# EAGLE board riffle-0.97 (EAGLE 7.3.0)
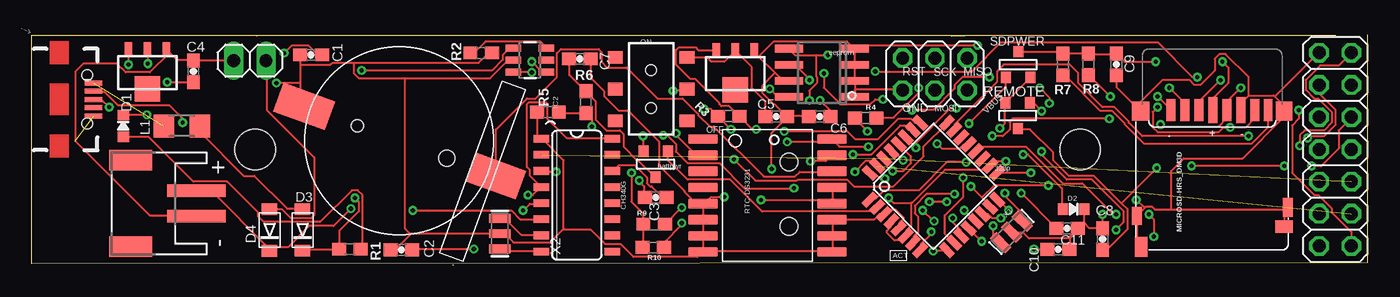
[diagram p0: board, top side]
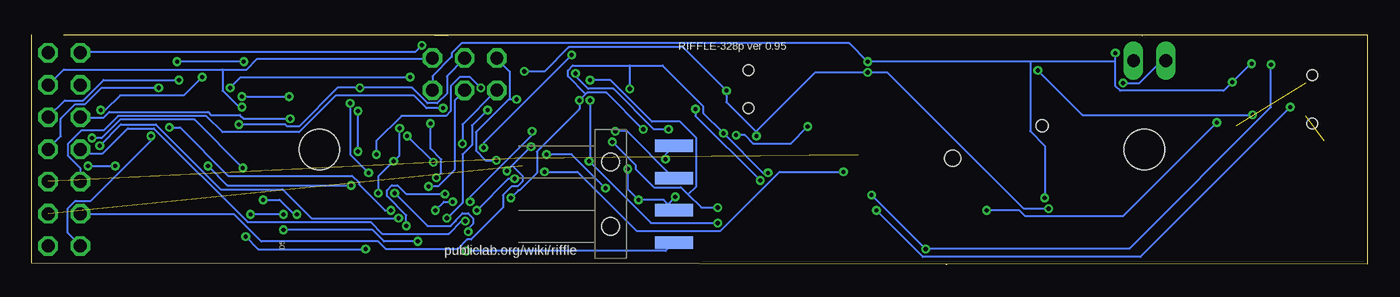
[diagram p1: board, bottom side, seen from below]

Size 105.25 x 18.15 mm. Coordinates in mm from the lower left corner, seen from the top.
Outline: 105.25,18.15 105.25,0.15 0,0.1 0,18.13 17.73,18.1
Outline: 17.73,18.1 102.72,18.11
Outline: 17.75,18.06 17.73,18.1
Outline: 23.37,18.11 23.42,18.11
Outline: 33.15,0 33.25,0
Outline: 72.47,18.06 74.59,18.1
Copper layers (1*16): Top 0.0356mm / dielectric 1.5011mm / Bottom 0.0356mm
Design rules "LaenPCBOrder": minimum track width 6mil, minimum drill 13mil, track to track 6mil, track to pad 6mil, pad to pad 6mil, via to via 6mil, smd to smd 6mil, copper to edge 15mil, drill to drill 6mil, minimum pad ring 7mil, minimum via ring 7mil, stop-mask expansion 3mil, vias tented up to drill 0mil, thermal gap 10mil
Holes 3.2 mm at 82.59,9.1 17.59,9.1

## Footprints (pad centres in the part's own frame; a part is rotated, then mirrored left to right if it is on the bottom)
BATTCON_12MM_SMT = smd 2.4 x 4.3: P$1 0,11.96 | smd 2.4 x 4.2: P$2 0,-4.1 | hole 0.95: 0,7.5 | hole 1.25: 0,0
SOT-23 = smd 0.787 x 0.889: 1 0.025,-1.016; 2 -0.94,1.016; 3 0.991,1.016
0603-CAP = smd 1.1 x 1: 1 -0.85,0; 2 0.85,0
JST-PH-2-SMT-RA = smd 1 x 4.6: 1 1,-3.7; 2 -1,-3.7 | smd 1.6 x 3.4: NC1 -3.4,1.5; NC2 3.4,1.5
0603-LED = smd 0.8 x 0.9: MINUS -0.85,0; PLUS 0.85,0
SOD-123FL = smd 0.91 x 1.22: A 1.637,0; C -1.637,0
TQFP32-08 = smd 1.27 x 0.559: 1 -4.293,2.8; 2 -4.293,2; 3 -4.293,1.2; 4 -4.293,0.4; 5 -4.293,-0.4; 6 -4.293,-1.2; 7 -4.293,-2; 8 -4.293,-2.8; 17 4.293,-2.8; 18 4.293,-2; 19 4.293,-1.2; 20 4.293,-0.4; 21 4.293,0.4; 22 4.293,1.2; 23 4.293,2; 24 4.293,2.8 | smd 0.559 x 1.27: 9 -2.8,-4.293; 10 -2,-4.293; 11 -1.2,-4.293; 12 -0.4,-4.293; 13 0.4,-4.293; 14 1.2,-4.293; 15 2,-4.293; 16 2.8,-4.293; 25 2.8,4.293; 26 2,4.293; 27 1.2,4.293; 28 0.4,4.293; 29 -0.4,4.293; 30 -1.2,4.293; 31 -2,4.293; 32 -2.8,4.293
SOT23-5 = smd 0.55 x 1.2: 1 -0.95,-1.3; 2 0,-1.3; 3 0.95,-1.3; 4 0.95,1.3; 5 -0.95,1.3; 6 0,1.3
SO16 = smd 0.6 x 1.2: 1 -4.445,-2.8; 2 -3.175,-2.8; 3 -1.905,-2.8; 4 -0.635,-2.8; 5 0.635,-2.8; 6 1.905,-2.8; 7 3.175,-2.8; 8 4.445,-2.8; 9 4.445,2.8; 10 3.175,2.8; 11 1.905,2.8; 12 0.635,2.8; 13 -0.635,2.8; 14 -1.905,2.8; 15 -3.175,2.8; 16 -4.445,2.8
SOT89 = smd 0.58 x 1.2: 1 -1.5,-1.8; 2 0,-1.8; 3 1.5,-1.8 | smd 2 x 2: 4 0,1.3
SO-08 = smd 0.6 x 2.2: 1 -1.905,-2.6; 2 -0.635,-2.6; 3 0.635,-2.6; 4 1.905,-2.6; 5 1.905,2.6; 6 0.635,2.6; 7 -0.635,2.6; 8 -1.905,2.6
2X03 = drill 1.016 octagon: 1 -2.54,-1.27; 2 -2.54,1.27; 3 0,-1.27; 4 0,1.27; 5 2.54,-1.27; 6 2.54,1.27
AYZ0202 = smd 1 x 1.15: 1 -2.5,2.825; 2 0,2.825; 3 2.5,2.825; 4 -2.5,-2.825; 5 0,-2.825; 6 2.5,-2.825 | hole 0.85: 1.5,0; -1.5,0
1X02 = drill 1.016 long: 1 -1.27,0; 2 1.27,0
1X04-SMD = smd 1 x 3: 1 -3.81,5; 2 -1.27,5; 3 1.27,5; 4 3.81,5 | hole 1.4: -2.54,0; 2.54,0
2X07 = drill 1.016 octagon: 1 -7.62,-1.27; 2 -7.62,1.27; 3 -5.08,-1.27; 4 -5.08,1.27; 5 -2.54,-1.27; 6 -2.54,1.27; 7 0,-1.27; 8 0,1.27; 9 2.54,-1.27; 10 2.54,1.27; 11 5.08,-1.27; 12 5.08,1.27; 13 7.62,-1.27; 14 7.62,1.27
R1206 = smd 1.6 x 1.803: 1 -1.422,0; 2 1.422,0
0603-NO = smd 1.1 x 1: 1 -0.85,0; 2 0.85,0
DS3231 = smd 0.762 x 2.286: 1 -4.445,-5.08; 2 -3.175,-5.08; 3 -1.905,-5.08; 4 -0.635,-5.08; 5 0.635,-5.08; 6 1.905,-5.08; 7 3.175,-5.08; 8 4.445,-5.08; 9 4.445,5.08; 10 3.175,5.08; 11 1.905,5.08; 12 0.635,5.08; 13 -0.635,5.08; 14 -1.905,5.08; 15 -3.175,5.08; 16 -4.445,5.08
DM3D = smd 0.7 x 1.75: CD/DAT3 8.15,0.45; CLK 4.85,0.45; CMD 7.05,0.45; DAT0 2.65,0.45; DAT1 1.6,0.45; DAT2 9.25,0.45 | smd 0.8 x 1.5: GND1 0.05,8.15 | smd 0.8 x 1.4: GND2 11.95,8.8 | smd 1.4 x 1.5: GND3 11.65,0.55 | smd 1.3 x 1.5: GND4 0.35,0.55 | smd 1 x 1.55: SW_A 11.6,11.25 | smd 1.4 x 1: SW_B 0.35,9.65 | smd 0.7 x 2.032: VDD 5.95,0.45; VSS 3.75,0.45
USB-AB-MICRO-SMD_V02_BOSS = smd 1.4 x 0.4: D+1 2.7,0; D-1 2.7,0.65; GND1 2.7,-1.3; ID1 2.7,-0.65; VBUS1 2.7,1.3 | hole 0.85: 2.2,1.9; 2.2,-1.9
RESONATOR-SMD = smd 0.7 x 1.7: 1 -1.2,0; 2 0,0; 3 1.2,0

## Placement (x,y rotation side)
BAT  CR1220  [BATTCON_12MM_SMT]  32.7,8.41 70 top
BATTPOWER  FDN340P  [SOT-23]  49.12,7.94 0 top
C1  10uF  [0603-CAP]  22.01,16.56 0 top
C2  0.1uF  [0603-CAP]  29.12,1.19 180 top
C3  0.1uF  [0603-CAP]  49.15,5.32 0 top
C4  10uF  [0603-CAP]  12.75,15.27 90 top
C5  10uF  [0603-CAP]  58.63,11.7 0 top
C6  10uF  [0603-CAP]  62.09,11.7 180 top
C7  0.1uF  [0603-CAP]  43.19,16.26 180 top
C8  0.1uF  [0603-CAP]  84.36,2.02 90 top
C9  0.1uF  [0603-CAP]  85.45,15.8 90 top
C10  0.1uF  [0603-CAP]  80.88,1.23 0 top
C11  0.1uF  [0603-CAP]  81.56,2.88 180 top
CN1  [JST-PH-2-SMT-RA]  9.29,4.85 90 top
D1  LED0603  [0603-LED]  7.22,10.96 270 top
D2  LED0603  [0603-LED]  82.07,4.4 180 top
D3  SCHOTTKY  [SOD-123FL]  21.34,2.75 90 top
D4  SCHOTTKY  [SOD-123FL]  18.74,2.75 90 top
IC1  ATMEGA328P  [TQFP32-08]  71.04,6.2 45 top
IC2  MCP73831  [SOT23-5]  39.24,16.15 270 top
IC3  CH340G  [SO16]  42.94,5.5 270 top
IC4  MCP1700-33  [SOT89]  55.43,15.1 180 top
IC5  24AA128SN  [SO-08]  62.26,15.15 90 top
IC6  MCP1700-33  [SOT89]  9.12,15.17 180 top
ISP  [2X03]  71.15,15.05 180 top
J1  AYZ0202  [AYZ0202]  48.8,13.87 270 top
JP1  [1X02]  17.18,16.11 0 top
JP3  [1X04-SMD]  59.64,5.58 270 bottom
JP5  [2X07]  102.69,9.11 270 top
L1  500mA  [R1206]  11.83,10.97 0 top
R1  10K  [0603-NO]  25.05,1.25 180 top
R2  4.7K  [0603-NO]  35.4,16.71 180 top
R3  10K  [0603-NO]  54.9,11.73 0 top
R4  10K  [0603-NO]  65.69,11.59 180 top
R5  10K  [0603-NO]  40.67,12.06 0 top
R6  10K  [0603-NO]  43.66,12.85 90 top
R7  50K  [0603-NO]  81.23,15.8 270 top
R8  50K  [0603-NO]  83.24,15.83 90 top
R9  10K  [0603-NO]  49.03,3.21 180 top
R10  10K  [0603-NO]  48.95,1.38 180 top
REMOTE  FDN340P  [SOT-23]  77.64,11.78 0 top
RTC-DS3231  DS3231  [DS3231]  57.96,5.48 270 top
SDPWER  FDN340P  [SOT-23]  77.73,15.8 180 top
U$1  MICROSD-HRS_DM3D  [DM3D]  99,12.67 180 top
U$4  [USB-AB-MICRO-SMD_V02_BOSS]  2.17,13.06 0 top
X2  12MHz  [RESONATOR-SMD]  36.88,2.47 270 top
X3  16 MHz  [RESONATOR-SMD]  77.18,2.6 45 top

## Library data of the parts
BAT IC2 IC3 J1 X2 = SparkFunNew
BATTPOWER REMOTE SDPWER = zetex; OC_FARNELL: unknown; OC_NEWARK: unknown
C1-C11 JP3 X3 = SparkFun
CN1 D3 D4 IC4 IC6 L1 = adafruit
D1 D2 = LowPowerLab
IC1 = atmel; MPN: ATMEGA8-16AU; OC_FARNELL: 9171371; OC_NEWARK: 73M8863
IC5 = microchip; MF: MICROCHIP; MPN: 24AA128-I/SN; OC_FARNELL: unknown; OC_NEWARK: 92C6842
ISP JP1 JP5 = pinhead
R1-R10 = microbuilder
RTC-DS3231 = _lh-library
U$1 = hrs_DM3D-SF
U$4 = Testing

## Nets
A0: IC1.23 JP5.13
A1: IC1.24 JP3.1
A2: IC1.25 JP3.2
A3: IC1.26 R5.2 R6.1
AREF: C10.1 IC1.20
D2: IC1.32 JP5.7
D3: IC1.1 JP5.5
D4: BATTPOWER.3 IC1.2
D5: IC1.9 JP3.4
D6: IC1.10 SDPWER.3
D7: IC1.11 U$1.CD/DAT3
D8: IC1.12 REMOTE.3
D9: IC1.13 R4.2
D10: IC1.14 JP5.2
D+: IC3.5 U$4.D+1
D-: IC3.6 U$4.D-1
GND: BAT.P$1 C1.1 C2.2 C4.2 C5.2 C6.2 C7.1 C8.2 C9.1 C10.2 C11.1 CN1.2 D2.MINUS IC1.3 IC1.5 IC1.21 IC2.2 IC3.1 IC4.1 IC5.1 IC5.2 IC5.3 IC5.4 IC5.7 IC6.1 ISP.6 JP1.1 JP3.3 JP5.1 R2.1 R5.1 RTC-DS3231.5 RTC-DS3231.6 RTC-DS3231.7 RTC-DS3231.8 RTC-DS3231.9 RTC-DS3231.10 RTC-DS3231.11 RTC-DS3231.12 RTC-DS3231.13 U$1.GND1 U$1.GND2 U$1.GND3 U$1.GND4 U$1.SW_A U$1.SW_B U$1.VSS U$4.GND1 X2.2 X3.2
MISO: IC1.16 ISP.1 JP5.4 U$1.DAT0
MOSI: IC1.15 ISP.4 JP5.6 U$1.CMD
N$1: D1.PLUS R1.1
N$2: IC1.7 X3.1
N$3: IC1.8 X3.3
N$4: C9.2 R7.1 R8.2 SDPWER.1 U$1.VDD
N$5: D1.MINUS IC2.1
N$6: IC2.5 R2.2
N$7: C8.1 JP5.3 REMOTE.1
N$8: C2.1 IC3.4 IC3.16 IC6.3
N$10: D3.A L1.2
N$11: IC3.7 X2.1
N$13: IC3.8 X2.3
N$14: D4.A JP1.2
N$15: BATTPOWER.1 C7.2 R6.2
N$16: R7.2 U$1.DAT1
N$17: D2.PLUS R4.1
N$18: R8.1 U$1.DAT2
N$19: L1.1 U$4.VBUS1
RESET: C3.1 IC1.29 ISP.5 R3.1
RST: C3.2 IC3.14
RTC_BATT: BAT.P$2 RTC-DS3231.14
RXD: IC1.30 IC3.2 JP5.10
SCK: IC1.17 ISP.3 JP5.8 U$1.CLK
SCL: IC1.28 IC5.6 JP5.11 R9.1 RTC-DS3231.16
SDA: IC1.27 IC5.5 JP5.9 R10.1 RTC-DS3231.15
TXD: IC1.31 IC3.3 JP5.12
VBAT [vcc]: BATTPOWER.2 CN1.1 D4.C IC2.3 J1.2 JP5.14
VBUS [vcc]: C1.2 C4.1 D3.C IC2.4 IC6.2 ISP.2 R1.2
VCC: C6.1 C11.2 IC1.4 IC1.6 IC1.18 IC4.3 IC5.8 R3.2 R9.2 R10.2 REMOTE.2 RTC-DS3231.2 SDPWER.2
VDD: C5.1 IC4.2 J1.1

## Tracks (layer width: path | path; a pad name or v marks a point on that pad's centre or on a via)
A0  (via drill 0.33)
  Top 0.152: v95.86,10.16 87.48,10.16 86.41,11.23 86.41,11.3 85.27,12.45 84.35,12.45 82.45,14.35 82.45,15.11 81.76,15.8 76.58,15.8 76.05,15.27 76.05,14.43 72.69,11.07 72.69,10.69 IC1.23
  Bottom 0.152: v95.86,10.16 95.86,9.78 100.58,5.05 101.8,5.05 102.41,4.44 102.41,2.54 101.42,1.55 JP5.13
A1  (via drill 0.33)
  Top 0.152: v55.32,8.33 57,6.65 60.27,6.65 60.35,6.73 64.24,6.73 64.77,6.2 67.89,6.2 70.26,8.56 70.26,9.32 72.08,11.15 IC1.24
  Bottom 0.152: v55.32,8.33 55.32,8.71 54.71,9.32 JP3.1
A2  (via drill 0.33)
  Top 0.152: v59.28,10.54 64.24,10.54 64.85,9.93 66.67,9.93 68.27,11.53 69.27,11.53 69.57,11.23 69.95,11.23 IC1.25
  Bottom 0.152: v59.28,10.54 58.37,10.54 54.71,6.88 JP3.2
A3  (via drill 0.33)
  Top 0.152: R5.2 41.53,11.99 43.59,11.99 R6.1 43.59,11.91 44.12,11.38 v44.12,10.92 | v64.69,8.71 66.14,8.71 68.43,11 68.73,11 69.04,10.69 69.42,10.69 IC1.26 | v60.05,6.05 56.16,6.05 54.18,8.03 51.66,8.03 50.75,8.94 50.75,9.55 50.06,10.24 v49.76,10.24
  Bottom 0.152: v64.69,8.71 62.71,8.71 v60.05,6.05 | v49.76,10.24 49.07,10.24 48.39,9.55 45.49,9.55 v44.12,10.92
AREF  (via drill 0.33)
  Top 0.152: v78.94,1.24 80.01,1.24 C10.1 | v88.39,2.24 88.39,3.61 v88.01,3.99 | v85.42,3.99 85.19,3.99 82.75,6.43 81.23,6.43 78.33,9.32 74.68,9.32 74.37,9.02 IC1.20
  Bottom 0.152: v78.94,1.24 87.4,1.24 v88.39,2.24 | v85.42,3.99 v88.01,3.99
D2  (via drill 0.33)
  Top 0.152: v67.21,6.81 66.83,6.81 66.45,7.19 66.07,7.19 IC1.32 | v70.18,4.29 71.02,3.45 v71.09,3.45
  Bottom 0.152: v67.21,6.81 67.67,6.81 v70.18,4.29 | v71.09,3.45 71.4,3.45 72.39,2.46 77.65,2.46 78.56,3.38 88.24,3.38 95.63,10.77 97.69,10.77 99.67,8.79 101.04,8.79 101.35,9.09 JP5.7
D3  (via drill 0.33)
  Top 0.152: v73.61,8.1 72.08,8.1 69.88,5.89 67.13,5.89 66.45,5.21 66.07,5.21 IC1.1 | v75.67,10.16 76.5,10.16 77.04,10.69 77.04,11.3 77.27,11.53 v84.89,11.53
  Bottom 0.152: v75.67,10.16 v73.61,8.1 | v84.89,11.53 88.54,11.53 88.85,11.84 91.13,11.84 91.36,12.06 99.14,12.06 99.59,11.61 101.35,11.61 JP5.5
D4
  Top 0.152: BATTPOWER.3 50.14,8.94 50.14,8.25 51.66,6.73 55.02,6.73 57.53,4.22 66.22,4.22 66.52,4.52 IC1.2
D5  (via drill 0.33)
  Top 0.152: v71.02,1.09 71.09,1.17 72.08,1.17 IC1.9
  Bottom 0.152: v71.02,1.09 55.32,1.09 54.71,1.7 JP3.4
D6  (via drill 0.33)
  Top 0.152: v73.84,11.15 76.73,14.05 76.73,14.73 SDPWER.3 | v73.38,6.88 73.38,5.36 71.93,3.91 71.93,2.46 72.62,1.78 IC1.10
  Bottom 0.152: v73.84,11.15 73.84,9.17 73,8.33 73,7.26 v73.38,6.88
D7  (via drill 0.33)
  Top 0.152: v72.54,3.68 72.54,3.38 73.15,2.77 73.15,2.39 IC1.11 | v69.34,12.22 71.02,12.22 72.69,13.89 72.69,14.2 73.3,14.81 v75.44,14.81 | v89.61,13.97 90.83,12.75 90.83,12.29 U$1.CD/DAT3
  Bottom 0.152: v72.54,3.68 71.32,4.9 71.32,8.71 70.56,9.47 70.56,11 v69.34,12.22 | v75.44,14.81 88.77,14.81 v89.61,13.97
D8  (via drill 0.33)
  Top 0.152: v79.55,12.14 78.94,12.75 78.64,12.75 REMOTE.3 | v79.55,8.94 79.55,8.71 81.53,6.73 83.51,6.73 86.03,4.22 86.03,3.38 v85.42,2.77 | v74.83,1.85 73.84,2.84 IC1.12
  Bottom 0.152: v79.55,8.94 v79.55,12.14 | v85.42,2.77 78.41,2.77 77.5,1.85 v74.83,1.85
D9  (via drill 0.33)
  Top 0.152: v65.84,10.54 64.85,11.53 R4.2 | v72.08,4.98 v70.71,4.98 | v73.46,4.29 74.29,3.45 IC1.13
  Bottom 0.152: v65.84,10.54 65.84,10.24 70.71,5.36 v70.71,4.98 | v72.08,4.98 72.77,4.98 v73.46,4.29
D10  (via drill 0.33)
  Top 0.152: v76.35,3.68 75.67,3.68 75.36,3.99 74.98,3.99 IC1.14 | v99.9,9.4 99.9,10.24 100.28,10.62 101.8,10.62 102.41,11.23 102.41,12.06 101.35,13.13 101.04,13.13 100.36,13.82 100.36,14.58 101.5,15.72 102.95,15.72 103.94,16.71 JP5.2
  Bottom 0.152: v76.35,3.68 83.21,3.68 85.5,5.97 90.37,5.97 95.48,11.07 98.22,11.07 v99.9,9.4
D+  (via drill 0.33)
  Top 0.152: v38.71,4.29 39.24,4.83 40.08,4.83 IC3.5 | v6.1,12.45 5.49,13.06 U$4.D+1
  Bottom 0.152: v38.71,4.29 35.05,0.63 17.91,0.63 v6.1,12.45
D-  (via drill 0.33)
  Top 0.152: v30.02,4.29 37.79,4.29 38.48,3.61 40.08,3.61 IC3.6 | v11.89,11.23 11.89,11.53 10.82,12.6 6.78,12.6 5.71,13.67 4.88,13.67 U$4.D-1
  Bottom 0.152: v30.02,4.29 27.43,4.29 26.97,3.84 19.28,3.84 v11.89,11.23
GND  (via drill 0.33)  (1 unrouted)
  Top 0.152: JP1.1 15.85,16.1 12.8,16.1 C4.2 12.73,16.18 11.43,16.18 10.67,16.94 IC6.1 10.82,16.71 9.3,15.19 7.39,15.19 6.71,15.87 4.04,15.87 3.43,15.27 3.43,9.78 9.3,3.91 12.95,3.91 CN1.2 | 21.18,14.35 21.18,12.75 21.41,12.52 BAT.P$1 | 21.18,14.35 21.18,15.8 | 21.18,15.8 21.18,16.56 C1.1 | 25.37,15.95 23.7,15.95 23.55,15.8 21.18,15.8 | 25.37,15.95 35.2,15.95 35.89,16.64 36.19,16.64 R2.1 | 29.41,14.73 25.76,14.73 25.37,15.11 25.37,15.95 | 29.41,14.73 36.12,14.73 37.49,16.1 37.87,16.1 IC2.2 | 21.18,14.35 v19.28,14.35 | C9.1 85.5,14.88 85.5,13.97 87.32,12.14 U$1.GND3 87.02,12.52 89.08,14.58 91.21,14.58 91.59,14.2 92.05,14.2 93.19,15.34 93.19,16.26 93.57,16.64 94.03,16.64 95.86,14.81 95.86,13.36 | 97.92,13.28 97.84,13.36 95.86,13.36 | 97.92,13.28 98.6,12.6 98.6,12.14 U$1.GND4 98.6,12.06 98.6,11.61 95.4,8.41 90.75,8.41 89.76,7.42 89.76,4.37 | 95.86,13.36 95.25,12.75 95.25,12.29 U$1.VSS | 97.92,13.28 101.35,16.71 JP5.1 | D2.MINUS 82.91,4.37 82.91,3.38 82.45,2.92 C11.1 | 81.76,2.08 81.76,2.24 82.37,2.84 C11.1 | 81.76,2.08 81.76,1.24 C10.2 | C11.1 82.91,3.3 83.29,2.92 84.35,2.92 C8.2 84.35,3 v84.35,3.99 | 81.76,2.08 78.56,2.08 78.1,2.54 77.19,2.54 X3.2 | U$1.SW_B 98.68,3.07 98.68,4.29 98.91,4.52 U$1.GND1 98.68,4.37 89.76,4.37 | U$1.SW_A 87.32,1.47 87.1,1.7 87.1,3.84 U$1.GND2 87.1,3.91 87.67,4.48 | 89.76,4.37 88.47,4.37 88.24,4.6 87.78,4.6 87.67,4.48 | 87.67,4.48 v87.02,5.13 | C5.2 59.51,11.76 61.19,11.76 C6.2 | 58.56,15.15 59.13,14.58 59.59,14.58 IC5.7 | 58.56,15.15 57.26,16.45 | 57.26,16.45 57,16.71 57,16.87 IC4.1 | 58.56,15.15 57.53,14.12 57.53,13.59 58.45,12.67 58.52,12.67 59.44,11.76 C5.2
  Top 0.152: 64.85,17.09 IC5.4 | 64.85,13.82 64.85,14.5 IC5.2 64.85,14.58 64.85,15.72 IC5.3 64.85,15.8 64.85,17.02 IC5.4 | 64.85,13.82 64.85,13.28 IC5.1 | 73.84,9.55 IC1.21 73.76,9.47 73.38,9.47 73.08,9.17 71.7,9.17 v71.32,9.55 | 64.85,13.82 68.58,13.82 ISP.6 | 57.26,16.45 58.45,17.63 64.24,17.63 64.77,17.09 IC5.4 | R5.1 39.85,11.99 39.85,10.24 40.08,10.01 IC3.1 | 40.16,9.93 IC3.1 | 29.83,2.43 29.87,2.46 X2.2 36.96,2.46 37.26,2.46 37.95,1.78 40.84,1.78 41.87,2.81 | 29.83,2.43 28.65,1.24 28.35,1.24 C2.2 | 41.87,2.81 41.91,2.84 41.91,8.25 40.23,9.93 IC3.1 | 63.09,5.13 63.09,6.05 RTC-DS3231.13 | 63.09,5.13 63.09,4.9 RTC-DS3231.12 63.09,5.13 | v57.45,5.13 63.09,5.13 | IC1.5 68.35,2.92 68.35,3.3 68.66,3.61 68.66,3.76 68.05,4.37 67.51,4.37 67.21,4.06 IC1.3 67.13,3.99 66.75,3.99 66.37,3.61 63.09,3.61 RTC-DS3231.11 63.09,3.53 63.09,2.31 RTC-DS3231.10 63.09,2.24 63.09,1.09 RTC-DS3231.9 63.02,1.09 52.96,1.09 RTC-DS3231.8 | RTC-DS3231.8 52.88,1.09 52.88,2.24 RTC-DS3231.7 52.88,3.53 RTC-DS3231.6 52.88,3.61 52.88,4.83 RTC-DS3231.5 | C7.1 44.04,14.73 45.11,13.67 45.11,13.28 46.25,12.14 47.02,12.14 49.45,9.7 49.45,7.8 51.43,5.82 51.43,5.74 52.27,4.9 52.81,4.9 RTC-DS3231.5 | v54.56,5.36 53.49,5.36 52.96,4.83 RTC-DS3231.5 | 41.87,2.81 41.91,2.77 44.04,2.77 45.19,1.63 46.41,1.63 47.4,0.63 52.43,0.63 52.81,1.02 RTC-DS3231.8 | v58.29,7.57 58.29,10.39 59.44,11.53 59.44,11.68 C5.2 | v74.52,17.32 65.15,17.32 64.92,17.09 IC5.4 | 29.41,14.73 29.41,2.84 29.83,2.43
  Bottom 0.152: v19.28,14.35 17.98,14.35 16.23,16.1 15.93,16.1 JP1.1 | v84.35,3.99 84.58,3.99 85.72,5.13 v87.02,5.13 | v71.32,9.55 71.32,11.07 68.66,13.74 ISP.6 | 55.13,4.79 54.71,4.37 JP3.3 | 55.13,4.79 55.47,5.13 v57.45,5.13 58.29,5.97 v58.29,7.57 | v54.56,5.36 55.13,4.79 | v74.52,17.32 75.06,16.79 101.35,16.79 JP5.1
MISO  (via drill 0.33)
  Top 0.152: v76.96,4.29 76.12,5.13 IC1.16 | U$1.DAT0 96.32,12.22 96.32,11.53 95.63,10.85 v94.41,10.85 93.88,10.85 93.5,10.46 88.7,10.46 88.32,10.85 88.32,12.06 v88.7,12.45
  Bottom 0.152: v76.96,4.29 77.42,4.29 79.48,6.35 79.48,6.5 80.01,7.04 89.76,7.04 93.57,10.85 v94.41,10.85 | 90.22,15.42 102.72,15.42 103.94,14.2 JP5.4 | 90.22,15.42 88.32,15.42 87.48,16.26 73.76,16.26 ISP.1 | v88.7,12.45 88.93,12.45 90.22,13.74 90.22,15.42
MOSI  (via drill 0.33)
  Top 0.152: v73.99,6.2 74.87,5.32 | 74.87,5.32 75.44,4.75 75.44,4.6 IC1.15 | v93.65,14.58 91.97,12.9 91.97,12.29 U$1.CMD | 74.87,5.32 75.82,6.27 v80.09,6.27 | v98.68,7.8 v91.36,7.8 | v100.81,7.8 101.57,7.8 102.95,9.17 102.95,10.62 103.94,11.61 JP5.6
  Bottom 0.152: v73.99,6.2 73.23,6.2 71.93,7.49 71.93,12.98 71.17,13.74 ISP.4 | v93.65,14.58 99.59,14.58 101.19,12.98 102.64,12.98 103.94,11.68 JP5.6 | v80.09,6.27 89.84,6.27 v91.36,7.8 | v100.81,7.8 v98.68,7.8
N$1
  Top 0.152: D1.PLUS 7.24,10.08 9.22,10.08 12.73,6.58 15.39,6.58 17.83,4.14 17.83,3.84 18.29,3.38 22.71,3.38 25.22,5.89 25.68,5.89 26.06,5.51 26.06,1.47 25.91,1.32 R1.1
N$2  (via drill 0.33)
  Top 0.152: v72.69,5.59 70.48,5.59 69.57,4.67 69.57,4.06 69.8,3.84 69.8,2.54 69.49,2.24 69.49,1.78 IC1.7 | v75.74,3.07 75.74,2.31 76.28,1.78 X3.1
  Bottom 0.152: v72.69,5.59 75.74,5.59 76.43,6.27 76.89,6.27 77.27,5.89 77.27,5.44 75.74,3.91 v75.74,3.07
N$3  (via drill 0.33)
  Top 0.152: v70.87,2.62 70.87,2.46 70.03,1.63 70.03,1.24 IC1.8 | v76.66,5.66 76.66,5.44 78.03,4.06 X3.3
  Bottom 0.152: v70.87,2.62 70.87,2.84 70.48,3.23 70.48,3.68 70.87,4.06 71.32,4.06 71.86,3.53 71.86,3.45 72.24,3.07 74.07,3.07 v76.66,5.66
N$4  (via drill 0.33)
  Top 0.152: SDPWER.1 77.72,16.79 81.08,16.79 81.15,16.71 R7.1 81.23,16.71 83.21,16.71 R8.2 83.29,16.64 85.42,16.64 C9.2 85.5,16.64 86.11,16.03 v88.54,16.03 | v93.8,16.03 94.26,15.57 94.26,14.35 93.12,13.21 93.12,12.29 U$1.VDD
  Bottom 0.152: v88.54,16.03 v93.8,16.03
N$5  (via drill 0.33)
  Top 0.152: v9.07,11.84 7.24,11.84 D1.MINUS | v25.98,15.34 36.27,15.34 37.11,16.18 37.11,16.56 37.64,17.09 37.87,17.09 IC2.1
  Bottom 0.152: v9.07,11.84 22.48,11.84 v25.98,15.34
N$6
  Top 0.152: R2.2 34.59,16.71 34.82,16.71 35.74,17.63 40.08,17.63 40.54,17.17 IC2.5
N$7  (via drill 0.33)
  Top 0.152: 85.84,4.86 86.33,4.37 86.33,2.84 84.73,1.24 84.43,1.24 C8.1 | 85.84,4.86 83.67,7.04 81.69,7.04 80.47,8.25 80.47,8.86 78.64,10.69 77.72,10.69 REMOTE.1 | v100.51,10.01 100.66,10.16 101.8,10.16 102.72,11.07 102.72,12.22 101.42,13.51 101.42,14.12 JP5.3 | 85.84,4.86 v88.62,7.65
  Bottom 0.152: v100.51,10.01 99.75,10.01 98.3,11.46 92.43,11.46 v88.62,7.65
N$8  (via drill 0.33)
  Top 0.152: v34.82,1.24 30.02,1.24 C2.1 | v39.09,5.51 39.47,5.51 40.08,6.12 IC3.4 40.08,6.2 39.24,7.04 39.24,7.49 39.01,7.72 39.01,12.67 39.17,12.83 40.46,12.83 40.61,12.67 40.61,11.53 42.14,10.01 45.72,10.01 IC3.16 | v7.62,15.8 7.62,16.94 IC6.3
  Bottom 0.152: v39.09,5.51 v34.82,1.24 34.82,1.32 18.74,1.32 7.62,12.45 v7.62,15.8
N$10
  Top 0.152: D3.A 21.34,4.44 20.12,4.44 17.53,7.04 16.69,7.04 13.26,10.46 13.26,10.92 L1.2
N$11
  Top 0.152: IC3.7 40.08,2.39 38.56,2.39 37.34,3.61 36.96,3.61 X2.1
N$13
  Top 0.152: IC3.8 40.08,1.09 37.11,1.09 36.96,1.24 X2.3
N$14
  Top 0.152: D4.A 18.74,4.37 19.74,4.37 20.42,3.68 22.02,3.68 22.25,3.91 22.25,8.48 18.52,12.22 18.52,16.1 JP1.2
N$15
  Top 0.152: BATTPOWER.1 49.07,6.96 47.78,8.25 47.7,8.25 46.63,9.32 46.63,10.31 46.33,10.62 45.26,10.62 44.42,11.46 44.42,12.9 43.66,13.67 R6.2 43.59,13.74 42.37,14.96 42.37,16.26 C7.2
N$16
  Top 0.152: R7.2 81.23,14.88 81.46,14.88 84.2,12.14 85.12,12.14 86.11,11.15 86.11,11.07 87.63,9.55 96.09,9.55 97.38,10.85 97.38,12.22 U$1.DAT1
N$17  (via drill 0.33)
  Top 0.152: v78.1,8.71 78.49,8.71 81.15,6.05 81.15,4.44 D2.PLUS | v69.88,13.97 69.88,13.59 67.89,11.61 66.6,11.61 R4.1
  Bottom 0.152: v78.1,8.71 78.1,9.78 76.12,11.76 72.62,11.76 72.24,12.14 72.24,14.12 71.55,14.81 70.71,14.81 v69.88,13.97
N$18  (via drill 0.33)
  Top 0.152: v84.96,13.28 83.29,14.96 R8.1 | v88.7,13.28 89.69,12.29 U$1.DAT2
  Bottom 0.152: v88.7,13.28 v84.96,13.28
N$19  (1 unrouted)
RESET  (via drill 0.33)
  Top 0.152: v68.66,8.25 67.97,8.94 67.74,8.94 IC1.29 | v47.85,6.65 47.85,6.58 48.23,6.2 48.23,5.36 C3.1 | v52.96,12.29 53.49,12.29 54.03,11.76 R3.1 54.1,11.68 v55.09,10.69 | v67.06,13.06 66.45,13.06 66.07,12.67 63.7,12.67 62.41,13.97 v62.41,15.11
  Bottom 0.152: v68.66,8.25 69.49,8.25 70.26,9.02 70.26,10.46 67.63,13.09 | 67.63,13.09 67.59,13.13 67.59,15.27 68.58,16.26 ISP.5 | v47.85,6.65 52.96,11.76 v52.96,12.29 | v67.06,13.06 67.59,13.06 67.63,13.09 | v62.41,15.11 62.41,14.88 61.42,13.89 59.44,13.89 56.24,10.69 v55.09,10.69
RST
  Top 0.152: C3.2 49.99,5.36 49.68,5.36 48.84,6.2 48.69,6.2 48.46,6.43 48.46,6.88 47.47,7.87 46.25,7.87 45.8,7.42 IC3.14
RTC_BATT
  Top 0.152: RTC-DS3231.14 63.02,7.34 60.5,7.34 60.12,6.96 57.68,6.96 53.72,10.92 53.42,10.92 52.5,11.84 52.5,11.91 51.28,13.13 49.3,13.13 46.86,15.57 45.34,15.57 44.88,16.03 44.88,16.79 44.65,17.02 41.68,17.02 41.38,16.71 41.38,14.81 39.7,13.13 39.01,13.13 36.58,10.69 36.58,7.04 BAT.P$2
RXD  (2 unrouted)
SCK  (via drill 0.33)
  Top 0.152: v95.25,13.97 94.18,12.9 94.18,12.29 U$1.CLK 94.11,12.22 94.11,11.53 93.5,10.92 89.08,10.92 v88.93,11.07 | v78.71,7.26 76.12,7.26 IC1.17 | v80.16,12.75 80.16,13.21 v79.4,13.97
  Bottom 0.152: v95.25,13.97 99.75,13.97 101.04,12.67 101.8,12.67 102.95,11.53 102.95,10.16 103.94,9.17 JP5.8 | v78.71,7.26 80.16,8.71 v80.16,12.75 | ISP.3 71.17,16.26 72.54,14.88 72.54,13.51 73.3,12.75 74.07,12.75 75.29,13.97 v79.4,13.97 81.15,13.97 84.2,10.92 85.12,10.92 85.27,11.07 v88.93,11.07
SCL  (via drill 0.33)
  Top 0.152: v51.21,4.52 49.91,3.23 R9.1 | v59.51,9.7 62.86,9.7 63.02,9.86 RTC-DS3231.16 63.09,9.86 63.63,9.32 v65.91,9.32 | v67.82,7.42 68.66,7.42 69.27,8.03 69.27,8.56 68.35,9.47 IC1.28 | v61.26,14.58 61.26,14.66 60.2,15.72 59.66,15.72 IC5.6
  Bottom 0.152: v51.21,4.52 52.5,4.52 53.53,5.55 | 53.53,5.55 54.1,6.12 56.24,6.12 57.68,7.57 57.68,7.87 v59.51,9.7 | v65.91,9.32 67.4,7.84 | 67.4,7.84 v67.82,7.42 | v61.26,14.58 59.66,14.58 56.39,11.3 54.18,11.3 52.88,10.01 52.88,6.2 53.53,5.55 | 67.4,7.84 66.6,7.04 66.6,6.58 66.98,6.2 67.44,6.2 68.12,5.51 68.12,4.52 70.64,2.01 70.94,2.01 71.7,1.24 77.34,1.24 77.95,1.85 87.17,1.85 89.31,3.99 101.35,3.99 JP5.11
SDA  (via drill 0.33)
  Top 0.152: v51.21,3.3 51.21,3.15 49.83,1.78 49.83,1.4 R10.1 | v61.34,8.18 62.56,8.18 63.02,8.64 RTC-DS3231.15 | 61.8,16.56 60.12,16.56 59.66,17.02 IC5.5 | 61.8,16.56 v62.71,16.56 | IC1.27 68.88,10.01 v69.65,9.25 69.49,9.47 72.39,12.37 v72.85,12.37 | v61.26,12.98 61.26,13.74 61.87,14.35 61.87,14.81 61.8,14.88 61.8,16.56
  Bottom 0.152: v51.21,3.3 56.46,3.3 v61.34,8.18 61.26,8.18 v61.26,12.98 | v69.65,9.25 69.65,9.63 v62.71,16.56 | v72.85,12.37 74.14,12.37 75.13,13.36 81.31,13.36 84.2,10.46 90.22,10.46 91.52,11.76 98.45,11.76 99.59,10.62 101.35,10.62 102.41,9.55 102.41,8.64 101.42,7.65 JP5.9
TXD  (via drill 0.33)  (1 unrouted)
  Top 0.152: v41.3,7.34 40.16,7.34 IC3.3 | v64.85,7.34 65.68,8.18 66.22,8.18 66.52,7.87 IC1.31
  Bottom 0.152: v41.3,7.34 46.33,7.34 50.98,2.69 57.61,2.69 62.26,7.34 v64.85,7.34
VBAT  (via drill 0.33)
  Top 0.152: CN1.1 13.03,5.82 14.17,5.82 18.67,1.32 18.67,1.17 D4.C 18.67,1.4 20.19,1.4 21.87,3.07 23.77,3.07 v25.15,4.44 | v48.16,10.16 48.16,9.02 BATTPOWER.2 | v50.52,13.74 51.51,13.74 51.59,13.82 J1.2 | v39.4,15.19 IC2.3 | v99.82,12.22 99.82,11.53 99.29,11 99.29,7.26 101.04,5.51 101.35,5.51 102.41,4.44 102.41,4.14 103.94,2.62 103.94,1.55 JP5.14 | v91.82,14.81 91.44,14.81 88.7,17.55 76.35,17.55 74.07,15.27 v66.45,15.27
  Bottom 0.152: v48.16,10.16 48.16,10.46 48.2,10.5 | 48.2,10.5 50.52,12.83 v50.52,13.74 53.95,17.17 62.94,17.17 64.85,15.27 v66.45,15.27 | 48.2,10.5 43.51,15.19 v39.4,15.19 37.87,15.19 27.13,4.44 v25.15,4.44 | v99.82,12.22 99.44,12.22 98.3,13.36 93.27,13.36 v91.82,14.81
VBUS  (via drill 0.33)
  Top 0.152: D3.C 21.41,1.17 21.49,1.24 24.16,1.24 R1.2 24.23,1.32 24.23,2.69 25.76,4.22 25.76,4.98 v25.45,5.28 | v10.67,14.43 12.73,14.43 C4.1 | v9.14,15.87 9.14,16.94 IC6.2 | v19.89,16.71 20.5,17.32 21.79,17.32 22.48,16.64 22.78,16.64 C1.2 | v39.4,16.03 40.16,15.27 40.54,15.27 IC2.4
  Bottom 0.152: v9.14,15.87 9.22,15.87 v10.67,14.43 11.35,13.74 19.51,13.74 19.89,14.12 19.89,16.03 | 19.89,16.03 v19.89,16.71 | 19.89,16.03 26.59,16.03 | 26.59,16.03 v39.4,16.03 40.84,17.48 71.4,17.48 72.16,16.71 72.16,16.41 73.69,14.88 73.69,13.82 ISP.2 | v25.45,5.28 25.45,9.4 26.59,10.54 26.59,16.03
VCC  (via drill 0.33)
  Top 0.152: SDPWER.2 78.64,14.73 76.73,12.83 REMOTE.2 76.66,12.75 76.66,11.15 v76.28,10.77 | IC1.4 67.67,3.38 67.67,3 67.36,2.69 67.36,2.54 67.97,1.93 68.43,1.93 68.81,2.31 IC1.6 68.88,2.39 68.88,2.69 69.27,3.07 69.27,4.83 69.3,4.86 | v77.95,5.66 80.7,2.92 C11.2 | v76.73,8.18 75.82,8.18 75.51,7.87 IC1.18 75.44,7.8 75.13,7.49 71.93,7.49 69.3,4.86 | 59.66,13.28 IC5.8 59.59,13.28 58.75,13.28 v58.14,13.89 | R10.2 48.16,1.4 48.16,3.15 R9.2 48.16,3.23 48.16,4.06 47.24,4.98 v47.24,7.26 | v62.1,12.98 62.86,12.22 62.86,11.76 C6.1 | v57.07,10.69 56.77,10.69 55.78,11.68 R3.2 55.7,11.76 54.94,12.52 54.33,12.52 54.18,12.67 54.18,12.75 52.27,14.66 51.89,14.66 50.75,15.8 50.75,16.94 50.98,17.17 52.27,17.17 52.5,16.94 53.87,16.94 IC4.3 | v50.75,10.39 50.75,10.24 52.27,8.71 52.81,8.71 RTC-DS3231.2 | v67.51,5.28 67.89,4.9 69.27,4.9 69.3,4.86
  Bottom 0.152: v77.95,5.66 77.95,6.96 v76.73,8.18 76.28,8.64 v76.28,10.77 | 61.61,13.47 61.49,13.59 59.97,13.59 v57.07,10.69 | 61.61,13.47 v62.1,12.98 62.1,12.29 65.46,8.94 65.46,7.26 66.83,5.89 66.9,5.89 v67.51,5.28 | v47.24,7.26 47.62,7.26 v50.75,10.39 52.35,11.99 52.35,12.52 55.55,15.72 58.14,15.72 | 58.14,15.72 62.64,15.72 63.02,15.34 63.02,14.88 61.61,13.47 | 58.14,15.72 v58.14,13.89
VDD
  Top 0.152: C5.1 57.76,11.76 57.76,12.9 56.69,13.97 56.69,15.65 55.47,16.87 IC4.2 55.4,16.87 54.56,16.03 53.57,16.03 53.26,16.33 51.66,16.33 J1.1

## Text on the board
tPlace: ON | eeprom | RST | SCK | MISO | IC2 | GND | MOSI | VBUS | OFF | 328p | battpwr | CH340G | X2 | ACT
bPlace: RIFFLE-328p ver 0.95 | D5 | publiclab.org/wiki/riffle
Document: all dimensions in mm | (M3 screw)